# Altium PCB STM32F4_Mixed-Signal_Interface_Board_PCB.PcbDoc
Units mm, origin at the board's own origin, x right, y up, seen from the top; angles counter-clockwise.
Board outline 42 x 34 mm, 4 copper layers (L1 (Signal), L2 (GND), L3 (PWR), L4 (Signal)), stack 1.57 mm thick; 37 components, 27 nets, 178 pads, 67 vias.
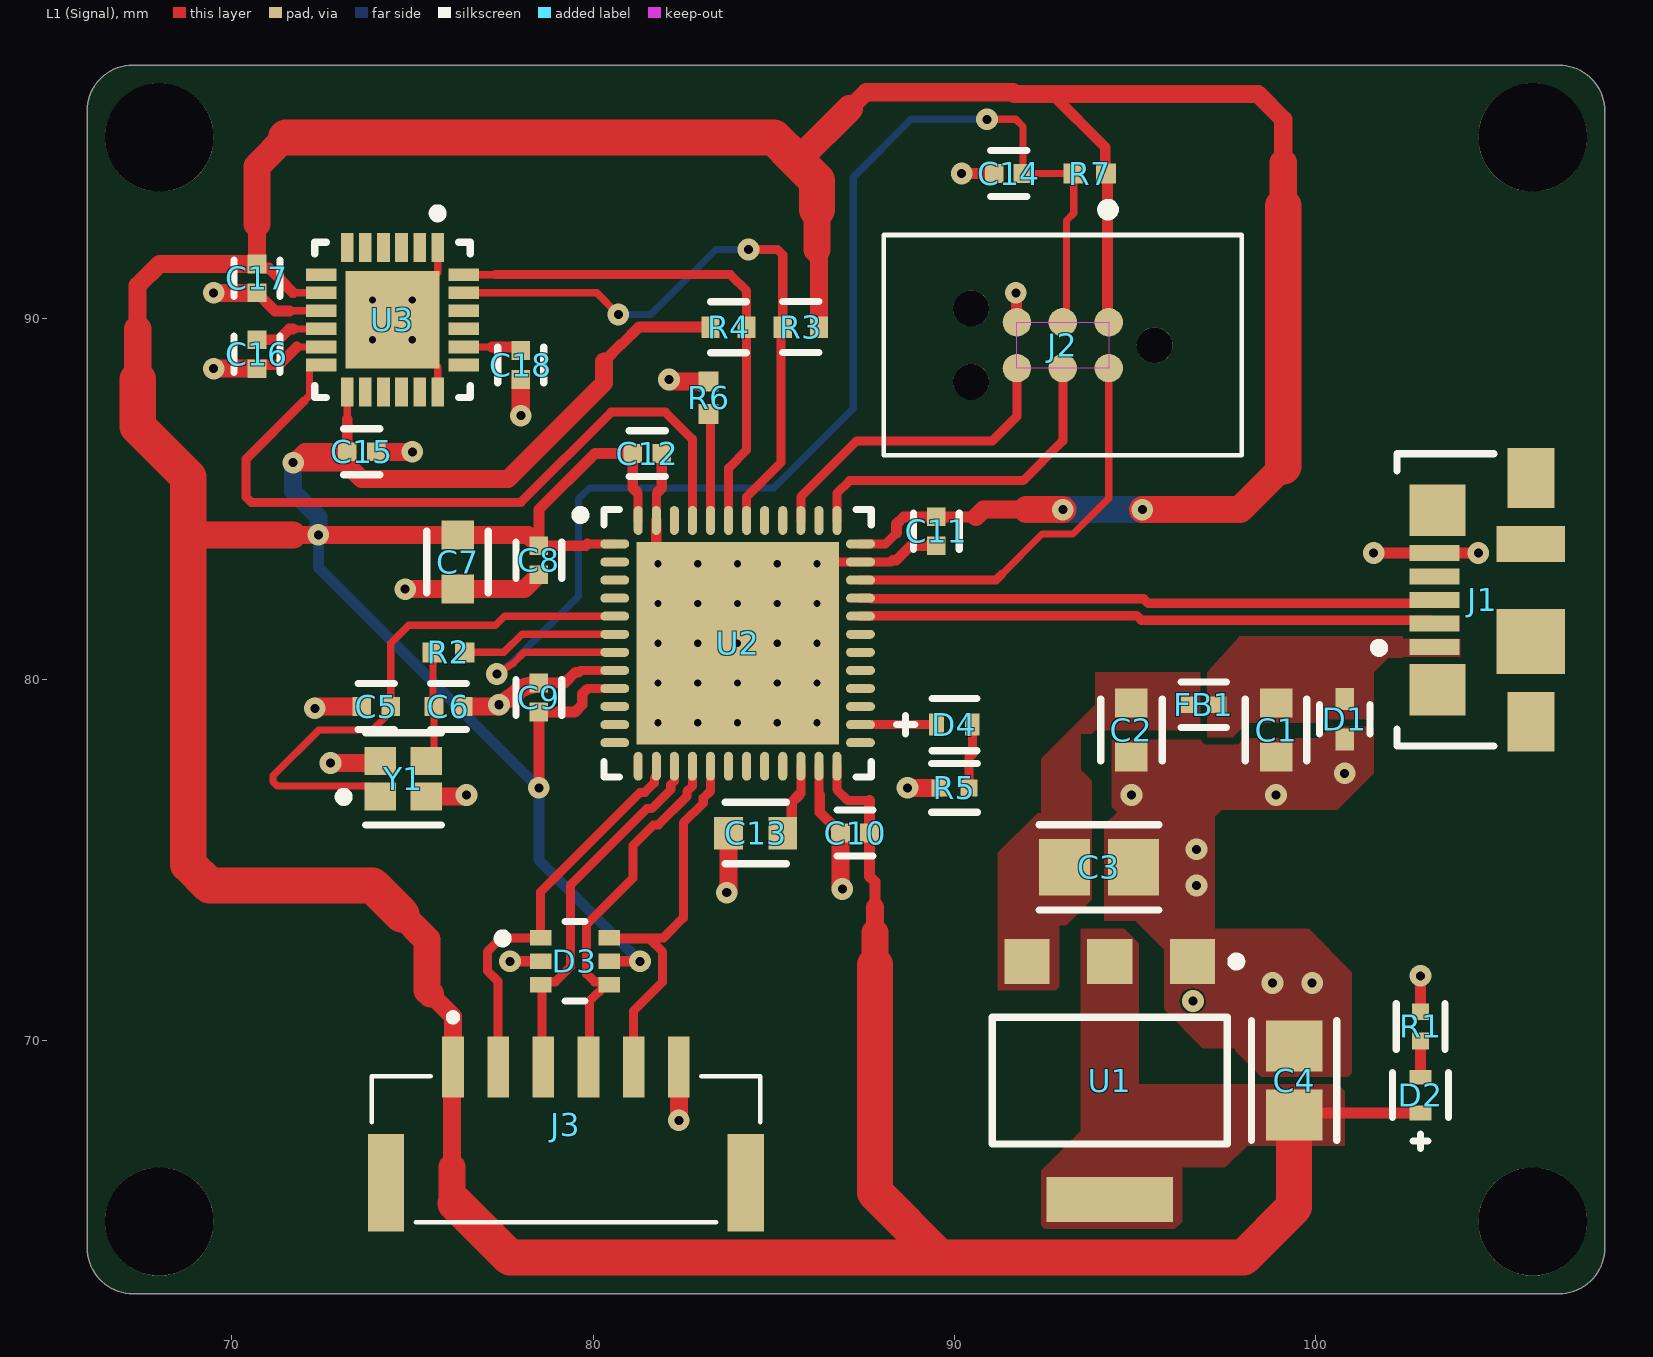
[diagram p0: L1 (Signal) view]
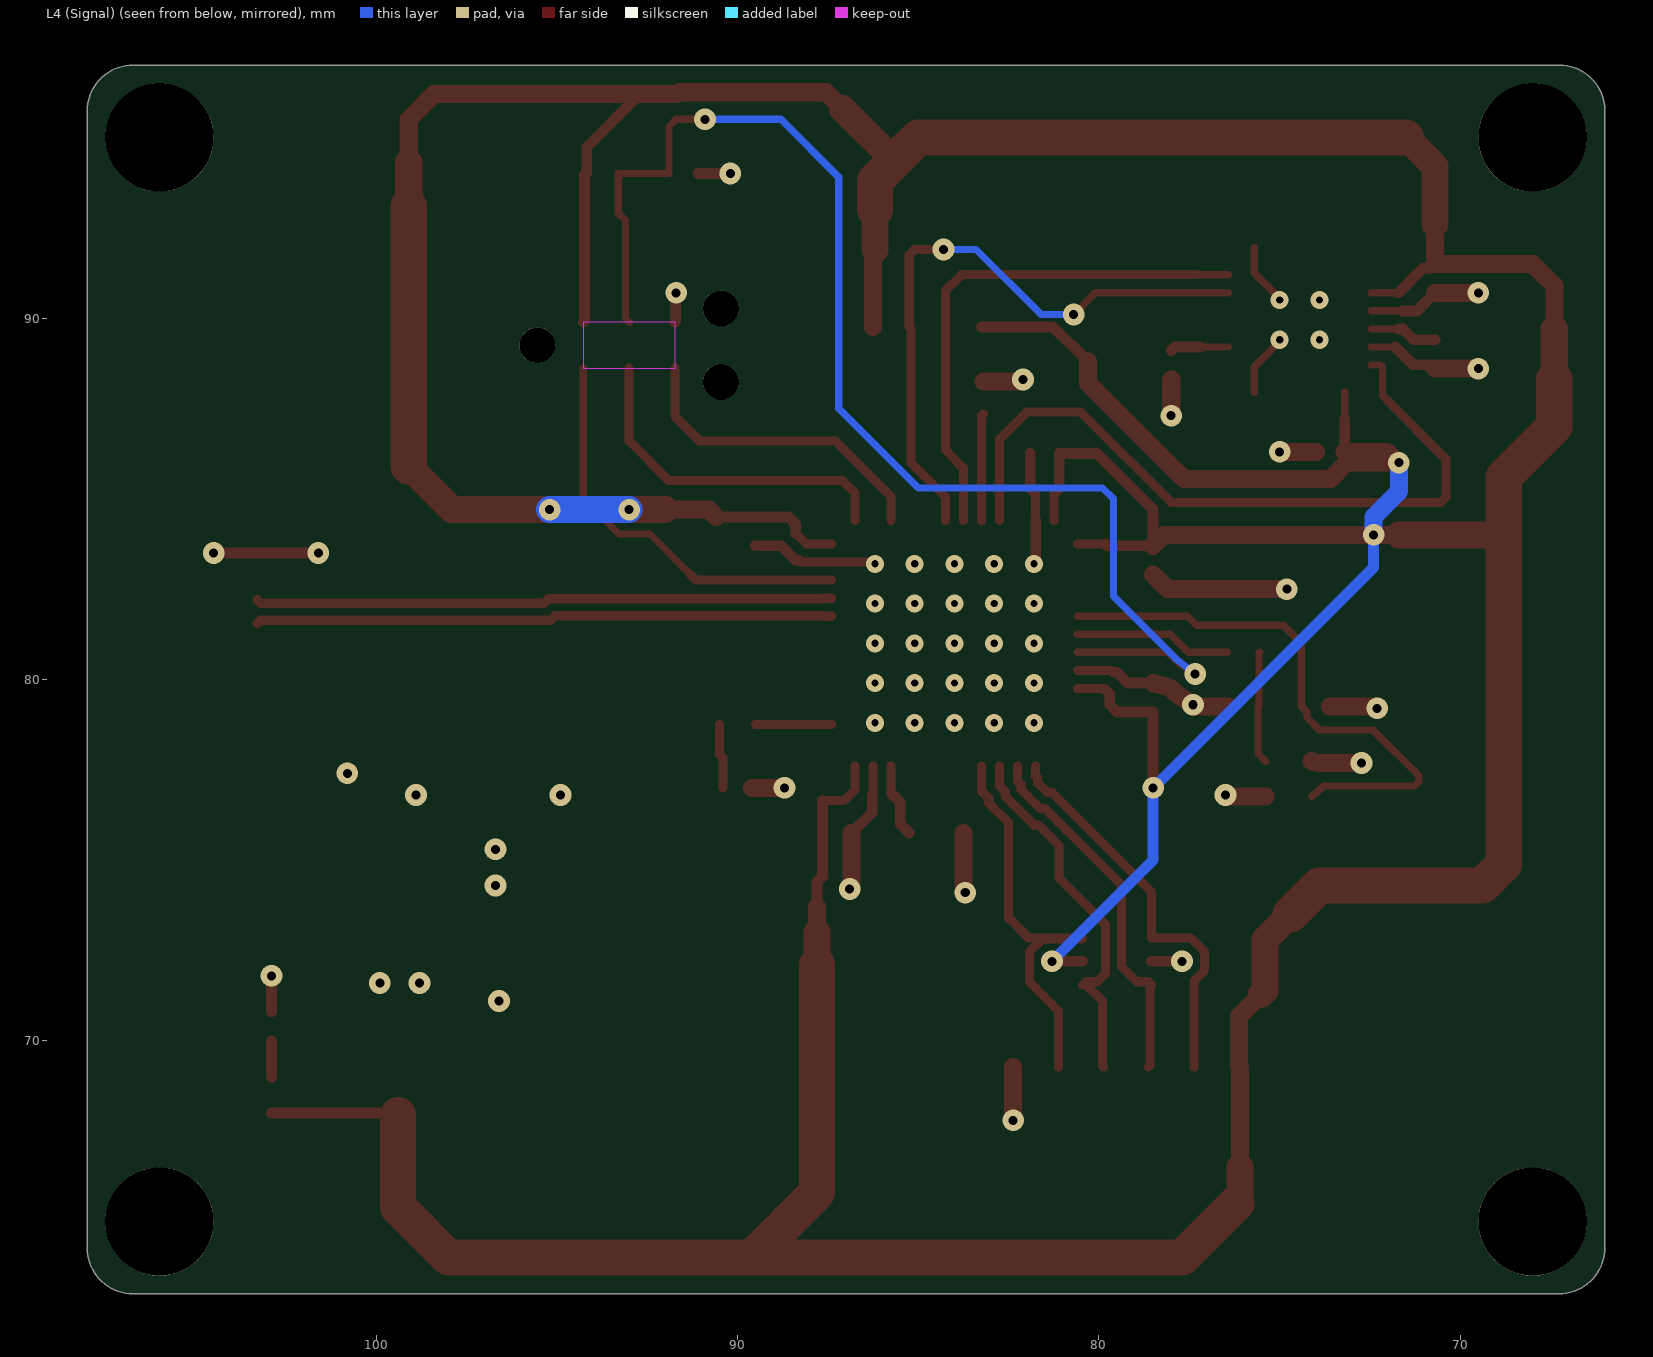
[diagram p1: L4 (Signal) view, seen from below]
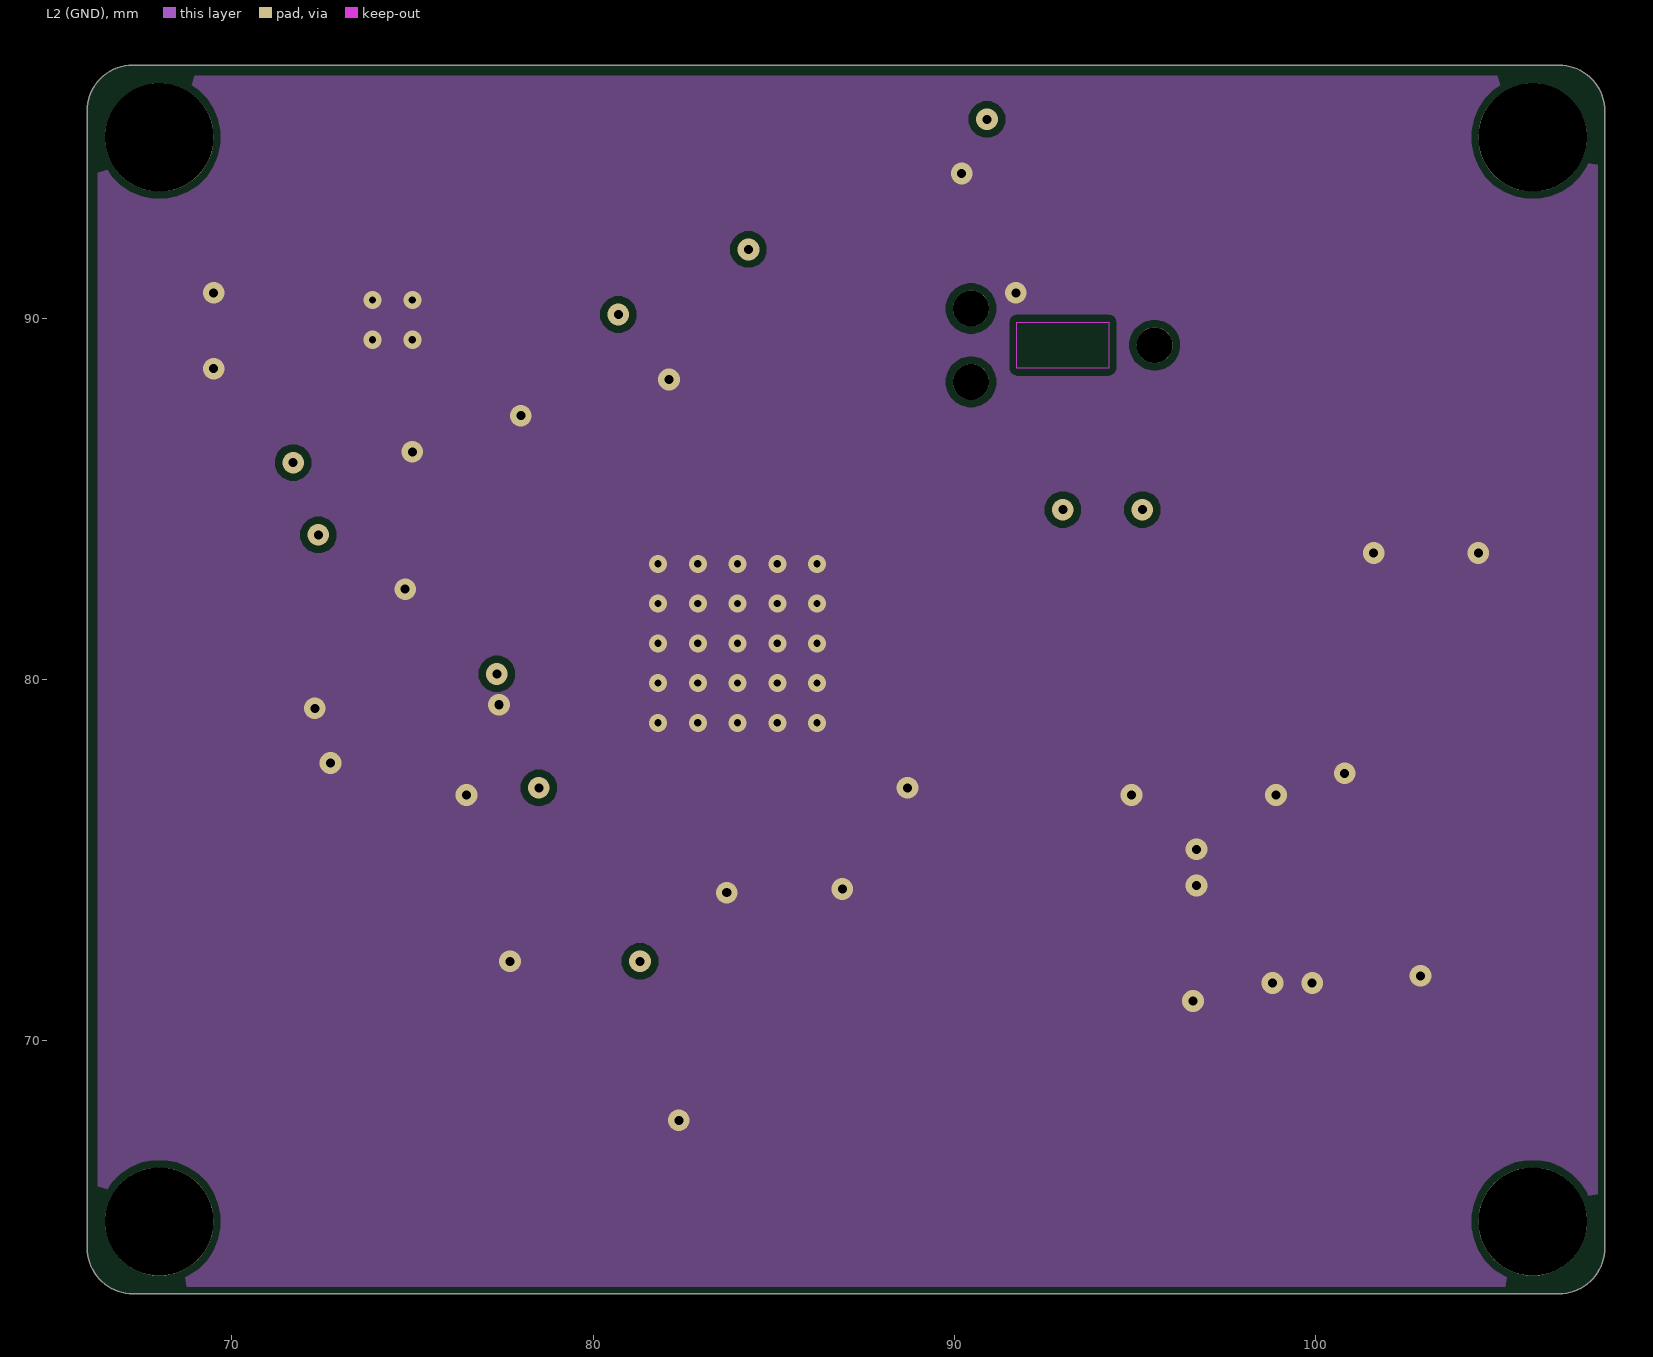
[diagram p2: L2 (GND)]
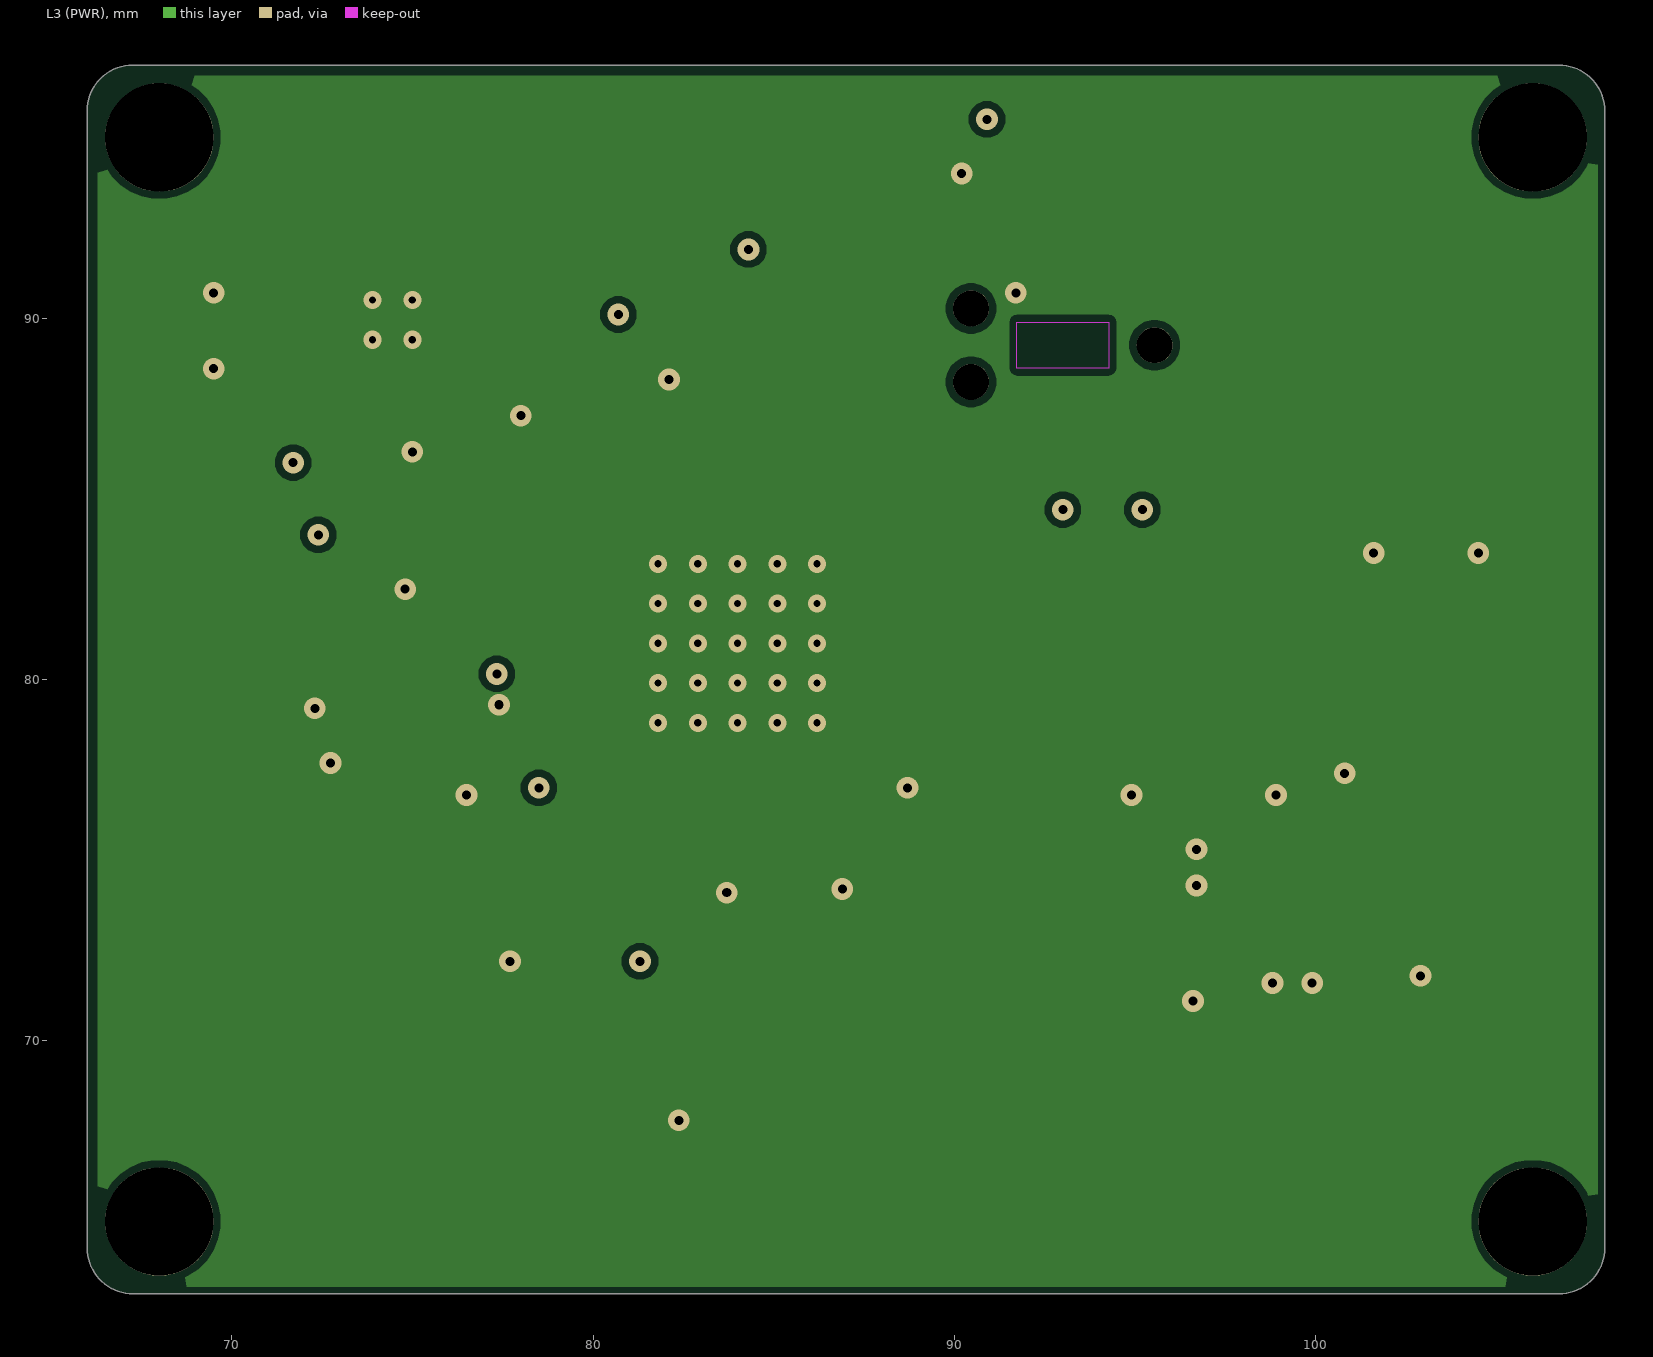
[diagram p3: L3 (PWR)]
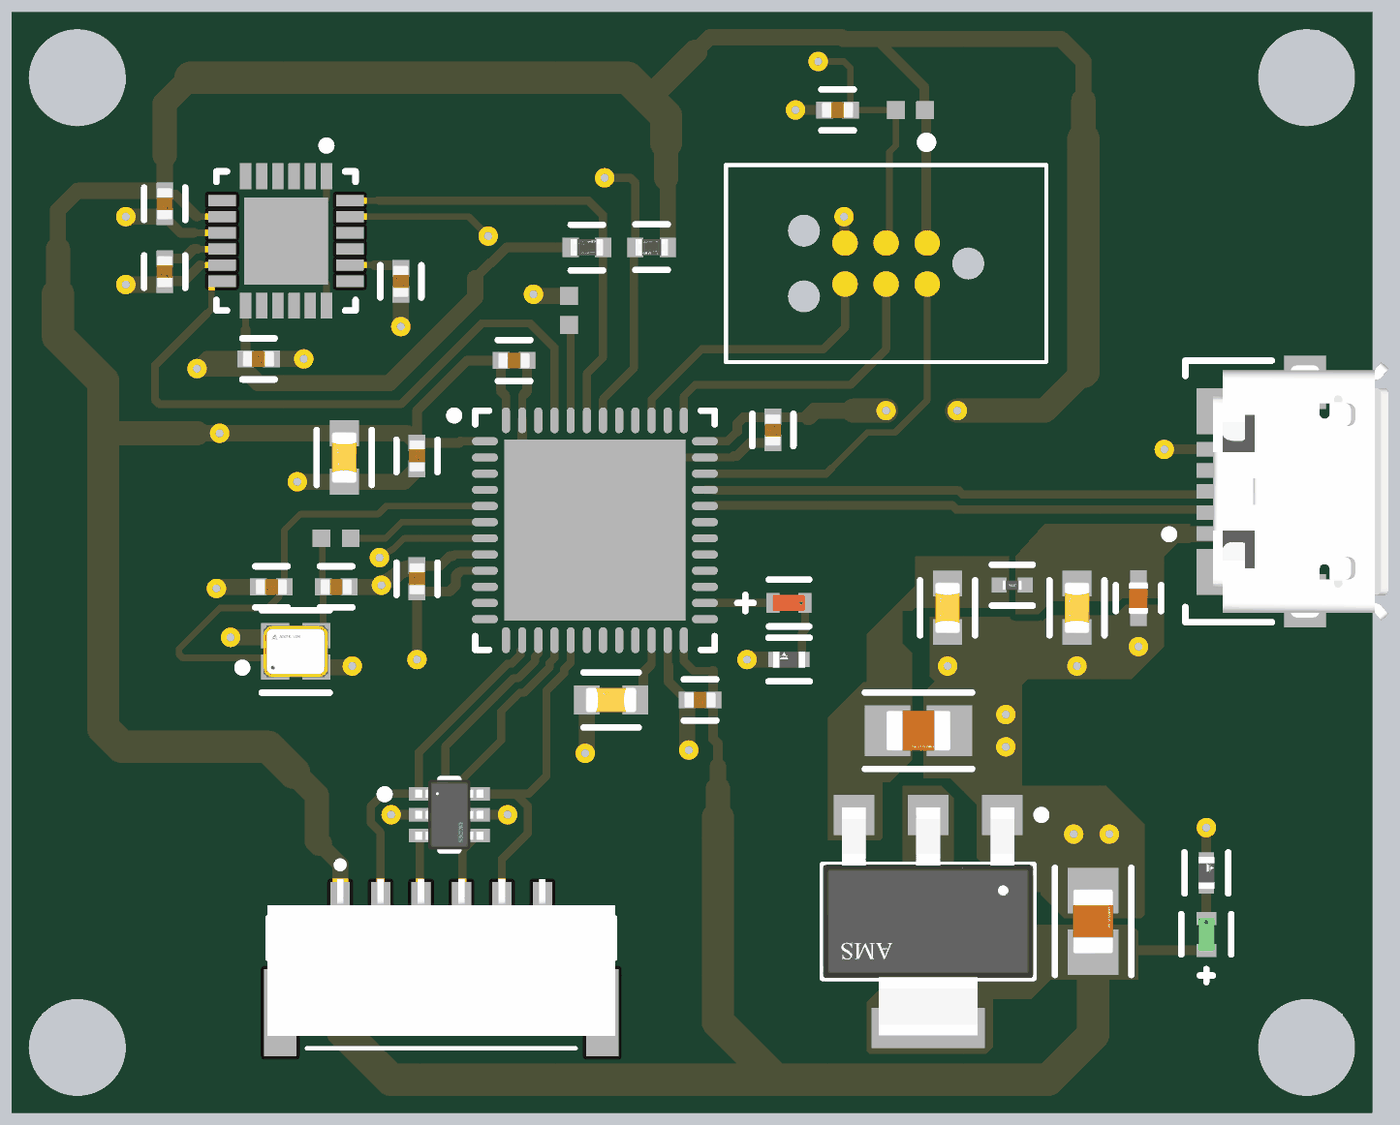
[diagram p4: 3D render of the assembled board from above, using the file's embedded part models]

## Layer stack, top to bottom
Top Solder: solder mask 0.0254, SM-001, Dk 4
L1 (Signal): signal copper 0.035
Dielectric 1: prepreg 0.2, PP-017, Dk 4.6
L2 (GND): signal copper 0.0175
Dielectric 3: core 1.065, Core-039, Dk 4.6
L3 (PWR): signal copper 0.0175
Dielectric 5: prepreg 0.2, PP-017, Dk 4.6
L4 (Signal): signal copper 0.035
Bottom Solder: solder mask 0.0254, SM-001, Dk 4

## Board outline
66,64.27 ccw(c67.27,64.27) 67.27,63 106.73,63 ccw(c106.73,64.27) 108,64.27 108,95.73 ccw(c106.73,95.73) 106.73,97 67.27,97 ccw(c67.27,95.73) 66,95.73

## Design rules (kind name [scope] priority, off if disabled: settings)
Clearance Clearance_MPU6050 [InComponent('U3') vs InComponent('U3')] p1: gap=0.15 ignorepadtopadclearanceinfootprint=FALSE
Clearance [All] p2: gap=0.2 ignorepadtopadclearanceinfootprint=FALSE
DiffPairsRouting [All] p1: maxlimit=0.254 minlimit=0.203 mostfreqgap=0.254 toplayer_maxgap=0.203 toplayer_prefgap=0.203 toplayer_minwidth=0.26 toplayer_maxwidth=0.26 toplayer_prefwidth=0.26 bottomlayer_maxgap=0.203 bottomlayer_prefgap=0.203 bottomlayer_minwidth=0.26 bottomlayer_maxwidth=0.26 bottomlayer_prefwidth=0.26 impedanceprofiledriven=TRUE impedanceprofileid={B25DD0A1-3687-4387-A5FD-A4604B58CD99} impedanceprofilevalue=90.000000 maxuncoupledlength=12.7
HoleSize [All] p1: absolutevalues=TRUE maxlimit=3.5 minlimit=0.025 maxpercent=80.000 minpercent=20.000
PolygonConnect [All] p1: connectstyle=Direct reliefconductorwidth=0.254 reliefentries=4 polygonreliefangle="90 Angle" airgapwidth=0.254
RoutingVias [All] p1: holewidth=0.3 width=0.6 viastyle="Through Hole" minholewidth=0.2 minwidth=0.5 maxholewidth=0.2 maxwidth=0.5
SolderMaskExpansion [All] p1: expansion=0 istentingtop=FALSE
SupplyNets "Schematic Supply Nets_3" [InNet('VBUS')] p1: voltage=0.000
SupplyNets "Schematic Supply Nets_2" [InNet('+3V3')] p2: voltage=0.000
SupplyNets "Schematic Supply Nets_1" [InNet('+5V')] p3: voltage=0.000
SupplyNets "Schematic Supply Nets" [InNet('GND')] p4: voltage=0.000
UnRoutedNet [All] p1: checkbadconnections=TRUE
Width [All] p1: maxlimit=1 minlimit=0.2 preferedwidth=0.3 midlayer1_minwidth=0.254 midlayer1_maxwidth=0.254 midlayer1_prefwidth=0.254 midlayer2_minwidth=0.254 midlayer2_maxwidth=0.254 midlayer2_prefwidth=0.254 minimp=50.000000 maximp=50.000000 favimp=50.000000
27 further rules are at their usual default settings.

## Classes and differential pairs
net class DIFF_USB: USB_D_N USB_D_P
differential pair USB_D: +USB_D_P -USB_D_N

## Components (designator, comment, footprint, x,y, rotation, side; value= is the part's Value field where it differs from the comment)
C1 "2u2" FP-CC0603-DA-MFG 98.9,78.6 r270 top value="2.2 uF"
C2 "2u2" FP-CC0603-DA-MFG 94.9,78.6 r270 top value="2.2 uF"
C3 "22u" FP-0805-L_2_0_0_2-W_1_25-IPC_A 94,74.8 r0 top
C4 "22u" FP-0805-L_2_0_0_2-W_1_25-IPC_A 99.4,68.9 r90 top
C5 "10p" FP-C0402-BB-MFG 74,79.25 r180 top value="10 pF"
C6 "10p" FP-C0402-BB-MFG 76,79.25 r0 top value="10 pF"
C7 "2u2" FP-CC0603-DA-MFG 76.25,83.25 r270 top value="2.2 uF"
C8 "100n" FP-C0402-BB-MFG 78.5,83.3 r270 top value="0.10 μF"
C9 "100n" FP-C0402-BB-MFG 78.5,79.5 r90 top value="0.10 μF"
C10 "100n" FP-C0402-BB-MFG 87.25,75.75 r180 top value="0.10 μF"
C11 "100n" FP-C0402-BB-MFG 89.5,84.1 r270 top value="0.10 μF"
C12 "100n" FP-C0402-BB-MFG 81.5,86.25 r0 top value="0.10 μF"
C13 "2u2" FP-CC0603-DA-MFG 84.5,75.75 r180 top value="2.2 uF"
C14 "100n" FP-C0402-BB-MFG 91.5,94 r180 top value="0.10 μF"
C15 "100n" FP-C0402-BB-MFG 73.6,86.3 r0 top value="0.10 μF"
C16 "100n" FP-C0402-BB-MFG 70.7,89 r270 top value="0.10 μF"
C17 "100n" FP-C0402-BB-MFG 70.7,91.1 r270 top value="0.10 μF"
C18 "2n2" FP-C0402-BB-MFG 78,88.7 r270 top value="0.10 μF"
D1 "5V TVS" FP-GG0402-MFG 100.8,78.9 r270 top value=10pF
D2 "Green LED" FP-SM0402GC-MFG 102.9,68.5 r90 top
D3 "D1213A-04S-7" FP-SOT363-MFG 79.5,72.2 r0 top
D4 "Red LED" FP-SM0402RC-MFG 90,78.75 r0 top
FB1 "120R" FP-MMZ0603-IPC_A 96.9,79.3 r180 top
J1 "473460001" FP-473460001-MFG 105.6,82.2 r90 top
J2 "TC2030-IDC-NL" TAG_TC2030-IDC-NL 93,89.25 r180 top
J3 "SM06B-GHS-TB" JST_SM06B-GHS-TB 79.25,67.4 r0 top
R1 "1k" FP-MCS0402-IPC_C 102.9,70.4 r90 top
R2 "0R" RESC1005X40X20NL05T10 76,80.75 r180 top
R3 "2k2" FP-RT0402-MFG 85.75,89.75 r180 top value=2.2KΩ
R4 "2k2" FP-RT0402-MFG 83.75,89.75 r0 top value=2.2KΩ
R5 "1k" FP-MCS0402-IPC_C 90,77 r180 top
R6 "10k" RESC1005X40X20NL05T10 83.2,87.8 r270 top
R7 "10k" RESC1005X40X20NL05T10 93.75,94 r0 top
U1 "AMS1117-3.3" FP-AMS1117-IPC_C 94.3,68.9 r270 top
U2 "STM32F411CEU6" STM-UFQFPN48_L 84,81 r0 top
U3 "MPU-6050" IS-QFN-24_V 74.45,89.95 r270 top
Y1 "24MHz" FP-ABM11W-MFG 74.75,77.25 r0 top

## Footprints (in the part's own frame and the unit in brackets; to place one, negate y for a bottom-side part, rotate by r counter-clockwise, add the part's x,y. Pads: shape width x height; smd on the part's side, far side on the other; paste and mask are expansions set on the pad)
FP-0805-L_2_0_0_2-W_1_25-IPC_A [mil]
  rect 55.42x61.5 smd paste+0 mask+0: 1(-37.49,0) 2(37.49,0)
  silkscreen extent -65,-46 65,46, body extent -85,-50 85,50, height 10
FP-473460001-MFG [mm]
  rect 0.45x1.38 smd paste+0 mask+0: 1(-1.3,2.31) 2(-0.65,2.31) 3(0,2.31) 4(0.65,2.31) 5(1.3,2.31)
  rect 1.425x1.55 smd paste+0 mask+0: 6(-2.488,2.225) 7(2.488,2.225)
  rect 1.65x1.3 smd paste+0 mask+0: 8(-3.375,-0.35) 11(3.375,-0.35)
  rect 1.8x1.9 smd paste+0 mask+0: 9(-1.15,-0.35)
  rect 1x1.9 smd paste+0 mask+0: 10(1.55,-0.35)
  silkscreen extent -4.05,0.67 4.05,3.97, body extent -4.3,-2.48 4.3,3.45, height 0.25
FP-ABM11W-MFG [mm]
  rect 0.875x0.775 smd paste+0 mask+0: 1(-0.637,-0.487) 2(0.637,-0.487) 3(0.637,0.487) 4(-0.637,0.487)
  silkscreen extent -1.77,-1.28 1.05,1.28, body extent -1.17,-0.97 1.17,0.97, height 0.25
FP-AMS1117-IPC_C [mm]
  rect 1.25x1.25 smd paste+0 mask+0: 1(-3.295,2.29) 2(-3.295,0) 3(-3.295,-2.29)
  rect 1.25x3.5 smd paste+0 mask+0: 4(3.295,0)
  silkscreen extent -3.42,-3.25 1.75,3.63, body extent -3.9,-3.35 3.9,3.35, height 0.25
FP-C0402-BB-MFG [mm]
  rect 0.52x0.52 smd paste+0 mask+0: 1(-0.4,0) 2(0.4,0)
  silkscreen extent -0.5,-0.64 0.5,0.64, body extent -0.8,-0.4 0.8,0.4, height 0.25
FP-CC0603-DA-MFG [mm]
  rect 0.8x0.9 smd paste+0 mask+0: 1(-0.75,0) 2(0.75,0)
  silkscreen extent -0.85,-0.85 0.85,0.85, body extent -1.35,-0.75 1.35,0.75, height 0.25
FP-GG0402-MFG [mm]
  rect 0.61x0.51 smd paste+0 mask+0: 1(-0.56,0) 2(0.56,0)
  silkscreen extent -0.4,-0.7 0.4,0.7, body extent -0.96,-0.43 0.96,0.43, height 0.25
FP-MCS0402-IPC_C [mm]
  rect 0.465x0.472 smd paste+0 mask+0: 1(-0.404,0) 2(0.404,0)
  silkscreen extent -0.64,-0.67 0.64,0.67, body extent -0.74,-0.38 0.74,0.38, height 0.25
FP-MMZ0603-IPC_A [mm]
  rect 0.463x0.463 smd paste+0 mask+0: 1(-0.4,0) 2(0.4,0)
  silkscreen extent -0.63,-0.63 0.63,0.63, body extent -0.83,-0.43 0.83,0.43, height 0.25
FP-RT0402-MFG [mm]
  rect 0.5x0.6 smd paste+0 mask+0: 1(-0.5,0) 2(0.5,0)
  silkscreen extent -0.5,-0.71 0.5,0.7, body extent -0.85,-0.4 0.85,0.4, height 0.25
FP-SM0402GC-MFG [mil]
  rect 16x24 smd paste+0 mask+0: 1(-19.5,0) 2(19.5,0)
  silkscreen extent -58,-30 25,31, body extent -31,-18 31,18, height 10
FP-SM0402RC-MFG [mil]
  rect 16x24 smd paste+0 mask+0: 1(-19.5,0) 2(19.5,0)
  silkscreen extent -63,-29 24,29, body extent -31,-18 31,18, height 10
FP-SOT363-MFG [mm]
  rect 0.6x0.42 smd paste+0 mask+0: 1(-0.95,0.65) 2(-0.95,0) 3(-0.95,-0.65) 4(0.95,-0.65) 5(0.95,0) 6(0.95,0.65)
  silkscreen extent -2.12,-1.1 0.28,1.1, body extent -1.35,-1.2 1.35,1.2, height 0.25
IS-QFN-24_V [mm] "QFN, 24-Leads, Body 4x4mm, Pitch 0.5mm, Thermal Pad 2.7x2.6mm"
  rect 0.8x0.35 smd: 1(-2,1.25) 2(-2,0.75) 3(-2,0.25) 4(-2,-0.25) 5(-2,-0.75) 6(-2,-1.25) 13(2,-1.25) 14(2,-0.75) 15(2,-0.25) 16(2,0.25) 17(2,0.75) 18(2,1.25)
  rect 0.35x0.85 smd mask+0.102: 7(-1.25,-1.975) 8(-0.75,-1.975) 9(-0.25,-1.975) 10(0.25,-1.975) 11(0.75,-1.975) 12(1.25,-1.975) 19(1.25,1.975) 20(0.75,1.975) 21(0.25,1.975) 22(-0.25,1.975) 23(-0.75,1.975) 24(-1.25,1.975)
  rect 2.7x2.6 smd: 25(0,0)
  silkscreen extent -3.07,-2.15 2.15,2.15, body extent -2,-2 2,2, height 0.95
JST_SM06B-GHS-TB [mm]
  rect 0.6x1.7 smd paste+0 mask+0.102: 1(-3.125,1.875) 2(-1.875,1.875) 3(-0.625,1.875) 4(0.625,1.875) 5(1.875,1.875) 6(3.125,1.875)
  rect 1x2.7 smd paste+0 mask+0.102: MP1(-4.975,-1.325) MP2(4.975,-1.325)
  silkscreen extent -5.38,-2.42 5.38,3.35, body extent -5.38,-2.05 5.38,2.8, height 4.25
RESC1005X40X20NL05T10 [mm] "Chip Resistor, 2-Leads, Body 1.00x0.50mm, IPC Medium Density"
  rect 0.55x0.55 smd: 1(-0.45,0) 2(0.45,0)
  body extent -0.53,-0.27 0.53,0.28, height 0.4
STM-UFQFPN48_L [mm] "QFN, 48-Leads, Body 7.1x7.1mm, Pitch 0.5mm, Thermal Pad 5.6x5.6mm, IPC High Density"
  oval 0.8x0.25 smd: 1(-3.4,2.75) 2(-3.4,2.25) 3(-3.4,1.75) 4(-3.4,1.25) 5(-3.4,0.75) 6(-3.4,0.25) 7(-3.4,-0.25) 8(-3.4,-0.75) 9(-3.4,-1.25) 10(-3.4,-1.75) 11(-3.4,-2.25) 12(-3.4,-2.75) 25(3.4,-2.75) 26(3.4,-2.25) 27(3.4,-1.75) 28(3.4,-1.25) 29(3.4,-0.75) 30(3.4,-0.25) 31(3.4,0.25) 32(3.4,0.75) 33(3.4,1.25) 34(3.4,1.75) 35(3.4,2.25) 36(3.4,2.75)
  oval 0.25x0.8 smd: 13(-2.75,-3.4) 14(-2.25,-3.4) 15(-1.75,-3.4) 16(-1.25,-3.4) 17(-0.75,-3.4) 18(-0.25,-3.4) 19(0.25,-3.4) 20(0.75,-3.4) 21(1.25,-3.4) 22(1.75,-3.4) 23(2.25,-3.4) 24(2.75,-3.4) 37(2.75,3.4) 38(2.25,3.4) 39(1.75,3.4) 40(1.25,3.4) 41(0.75,3.4) 42(0.25,3.4) 43(-0.25,3.4) 44(-0.75,3.4) 45(-1.25,3.4) 46(-1.75,3.4) 47(-2.25,3.4) 48(-2.75,3.4)
  rect 5.6x5.6 smd: 49(0,0)
  silkscreen extent -4.47,-3.7 3.7,3.7, body extent -3.55,-3.55 3.55,3.55, height 0.6
TAG_TC2030-IDC-NL [mil]
  round 30.98 smd paste-39.37: 1(-50,-25) 2(-50,25) 3(0,-25) 4(0,25) 5(50,-25) 6(50,25)
  round 39.02 hole 39.02 unplated: ""(-100,0) ""(100,-40) ""(100,40)
  Keep-Out Layer region: 50,-25.03 -50.06,-25.03 -50.06,25 50,25
  silkscreen extent -195,-154 195,120

## Part data
C1 C2 C7 C13: library part CMP-03422-000257-1, "CAP CER 2.2UF 16V X5R 0603", Capacitance="2.2 uF", Manufacturer=YAGEO, Manufacturer Part Number=CC0603MRX5R7BB225, Package=CC0603-DA, Temperature="-55°C to +125°C", Temperature Characteristic=X5R, Temperature Coefficient=15%, Temperature Range High=+125°C, Temperature Range Low=-55°C, Tolerance=0.2, Voltage="16 V", Automotive=No, Category=Cap, ComponentLink2Description=Datasheet, ComponentLink2URL=http://www.yageo.com/documents/recent/UPY-GPHC_X7R_6.3V-to-50V_18.pdf, Device Class L1="Passive Components", Device Class L2=Capacitors, Device Class L3="Ceramic Capacitors", Digikey Description="CAP CER 2.2UF 16V X5R 0603", Footprint Url=http://www.yageo.com/exep/pages/download/literatures/UPY-C_GEN_24.pdf, Height=0.9mm, Lead Free=Yes, Material=Ceramic, Mouser Description="Multilayer Ceramic Capacitors MLCC - SMD/SMT 2.2uF 16V 20% Ceramic Capacitor", Octopart=https://octopart.com/cc0603mrx5r7bb225-yageo-81932636, RoHS=TRUE, Voltage Rating="16 V"
C3 C4: library part CMP-14477-000140-3, "Multilayer Ceramic Capacitor 22uF 16V X5R 20% SMD 0805 T/R", Capacitance=22uF, Case Code (Imperial)=0805, Case Code (Metric)=2012, Dielectric=X5R, Max Operating Temperature=85°C, Min Operating Temperature=-55°C, Package Quantity=1, Resistor Type=Ceramic, Tolerance=20%, Voltage Rating=16V, Case/Package=0805, Construction=Flat, Halogen Free="Halogen Free", Height=1.25mm, Length=2mm, Mount="Surface Mount", Packaging="Tape and Reel", RoHS Compliant=Yes, Series=M, Termination=SMD/SMT, Thickness=0.049inch, Voltage Rating (DC)=16V, Width=0.039inch
C5 C6: library part CMP-03020-017648-1, "C0402 10 pF X8R 1.00% 16 V", Capacitance="10 pF", Manufacturer=Kemet, Manufacturer Part Number=C0402C100F4HACAUTO, Package=C0402-BB, Temperature="-55°C to +125°C", Temperature Characteristic=X8R, Temperature Coefficient=15%, Temperature Range High=+125°C, Temperature Range Low=-55°C, Tolerance=0.01, Voltage Rating="16 V", Automotive=No, Category=Cap, ComponentLink2Description=Datasheet, ComponentLink2URL=https://content.kemet.com/datasheets/KEM_C1002_X7R_SMD.pdf, Device Class L1="Passive Components", Device Class L2=Capacitors, Device Class L3="Ceramic Capacitors", Height=0.55mm, Ipc Land Pattern Name=CAPC10050X50, Lead Free=Yes, Material=Ceramic, Octopart=https://octopart.com/c0402c100f4hacauto-kemet-88079165, RoHS=TRUE
C8 C9 C10 C11 C12 C14 C15 C16 C17 C18: library part CMP-2008-03082-2, "CAP CER 0.1UF 16V X7R 0402", Capacitance="0.10 μF", Manufacturer=Kemet, Manufacturer Part Number=C0402C104K4RACAUTO, Package=C0402-BB, Temperature="-55°C to +125°C", Temperature Characteristic=X7R, Temperature Coefficient=15%, Temperature Range High=+125°C, Temperature Range Low=-55°C, Tolerance=0.1, Voltage Rating="16 V", Automotive=No, Category=Cap, ComponentLink2Description=Datasheet, ComponentLink2URL=https://content.kemet.com/datasheets/KEM_C1002_X7R_SMD.pdf, Device Class L1="Passive Components", Device Class L2=Capacitors, Device Class L3="Ceramic Capacitors", Digikey Description="CAP CER 0.1UF 16V X7R 0402", Height=0.55mm, Ipc Land Pattern Name=CAPC10050X50, Lead Free=Yes, Material=Ceramic, Mouser Description="Cap Ceramic 0.1uF 16V X7R 10% Pad SMD 0402 125C Automotive T/R", Octopart=https://octopart.com/c0402c104k4racauto-kemet-17309149, RoHS=TRUE
D1: library part CMP-04587-000001-1, "TVS DIODE 5V 12V 0402", Breakdown Voltage=5.5V, Capacitance=10pF, Clamping Voltage=12V, Manufacturer="AVX Corporation", Manufacturer Part Number=GG040205100N2P, Package=GG0402, Peak Pulse Current=16A, Peak Pulse Power=96W, Reverse Standoff Voltage=5V, Temperature="-55°C to +125°C", Temperature Range High=+125°C, Temperature Range Low=-55°C, Automotive=No, Category=Diode, ComponentLink2Description=Datasheet, ComponentLink2URL=http://datasheets.avx.com/AVX-GiGuard.pdf, Device Class L1="Circuit Protection", Device Class L2="TVS Diodes", Device Class L3=unset, Digikey Description="TVS DIODE 5V 12V 0402", Direction=Bidirectional, Height=0.55mm, Ipc Land Pattern Name=DIOC10060X50, Lead Free=Yes, Number Of Channels=1, Octopart=https://octopart.com/gg040205100n2p-avx-81066081, RoHS=TRUE
D2: library part CMP-35283-000001-2, "LED GREEN CLEAR 0402 SMD", Case Code (Imperial)=0402, Case Code (Metric)=1005, Color=Green, Forward Voltage=1.9V, Lens Color=Colorless, Test Current=20mA, Case/Package=0402, Dominant Wavelength=572nm, Height=0.71mm, Length=1mm, Lens Size=1mm, Lens Style=Flat, Lens Transparency=Clear, Luminous Intensity=28.5mcd, Mount="Surface Mount", Packaging="Tape and Reel", Viewing Angle=130°, Width=0.5mm
D3: library part CMP-12828-000023-1, "TVS DIODE 3.3V 10V SOT363", Breakdown Voltage=6V, Capacitance=1.2pF, Case/Package=SOT-363, Clamping Voltage=10V, Leakage Current=1uA, Max Operating Temperature=150°C, Max Power Dissipation=200mW, Max Surge Current=5A, Min Operating Temperature=-55°C, Package Quantity=3000, Peak Pulse Current=1A, Power Line Protection=Yes, Reverse Standoff Voltage=3.3V, Test Current=1mA, Contact Plating=Tin, Depth=1.3mm, Direction=Unidirectional, ESD Protection=Yes, Height=1mm, Lead Free="Lead Free", Length=2.15mm, Max Reverse Leakage Current=1uA, Min Breakdown Voltage=6V, Mount="Surface Mount", Number of Bidirectional Channels=4, Number Of Channels=4, Number of Pins=6, Packaging="Tape and Reel", Polarity=Unidirectional, Radiation Hardening=No, REACH SVHC="No SVHC", Termination=SMD/SMT, Width=1.35mm, Working Voltage=3.3V
D4: library part CMP-35283-000003-1, "LED RED CLEAR 0402 SMD", Case Code (Imperial)=0402, Case Code (Metric)=1005, Color=Red, Forward Voltage=2.1V, Lens Color=Colorless, Test Current=20mA, Case/Package=0402, Dominant Wavelength=631nm, Height=0.71mm, Length=1mm, Lens Size=1mm, Lens Style=Flat, Lens Transparency=Clear, Luminous Intensity=90mcd, Mount="Surface Mount", Packaging="Tape and Reel", Viewing Angle=130°, Width=0.5mm
FB1: library part CMP-08257-000058-1, "Signal Line Ferrite Bead 120Ω @ 100MHz 480mA DCR 220mΩ SMD 0201", Case Code (Imperial)=0201, Case Code (Metric)=0603, DC Resistance (DCR)=220mR, Max Current Rating=480mA, Max Operating Temperature=125°C, Min Operating Temperature=-55°C, Package Quantity=15000, Tolerance=25%, Case/Package=0201, Height=0.013inch, Impedance=120R, Length=0.024inch, Max DC Current=480mA, Mount="Surface Mount", Number of Lines=1, Packaging="Tape and Reel", RoHS Compliant=Yes, Termination=SMD/SMT, Weight=6E-06oz, Width=0.012inch
J1: library part CMP-2000-05246-2, "CONN RCPT USB2.0 MICRO B SMD R/A", Current Rating=1.8A, Manufacturer=Molex, Package=0, Temperature="-30°C to +85°C", Temperature Range High=+85°C, Temperature Range Low=-30°C, Voltage Rating=30V, Automotive=No, Category=Conn, ComponentLink2Description=Datasheet, ComponentLink2URL=https://www.molex.com/webdocs/datasheets/pdf/en-us/0473460001_IO_CONNECTORS.pdf, Conn Orientation="Right Angle", Contact Material=Gold,Nickel, Device Class L1=Connectors, Device Class L2="USB Connectors", Device Class L3=unset, Digikey Description="CONN RCPT USB2.0 MICRO B SMD R/A", Footprint Url=https://www.molex.com/pdm_docs/sd/473460001_sd.pdf, Height=2.945mm, Is Female=yes, Lead Free=Yes, Manufacturer Part Number=473460001, Number Of Contacts=5, Octopart=https://octopart.com/47346-0001-molex-7164928, Pitch=0.65mm, RoHS=TRUE, Shielding=true, Usb Standard="USB 2.0"
J2: library part CMP-003-000000-1, "CABLE ADAPTER 6 POS", Package=None, Availability=Unavailable, Component Type=Standard, Design Item ID=TC2030-IDC-NL, MP=TC2030-IDC-NL, Pin Count=6, Price=None, Source=TC2030-IDC-NL.SchLib
J3: library part CMP-002-00071-1, "Connector Header Surface Mount, Right Angle 6 position 0.049 (1.25mm)", Case/Package=None, Check_prices=https://www.snapeda.com/parts/SM06B-GHS-TB/JST/view-part/?ref=eda, Component Type=Standard, Design Item ID=SM06B-GHS-TB, MF="JST Sales", MP=SM06B-GHS-TB, Pins=6, SnapEDA_Link=https://www.snapeda.com/parts/SM06B-GHS-TB/JST/view-part/?ref=snap, Source=SM06B-GHS-TB.SchLib
R1 R5: library part CMP-2002-02445-2, "RES SMD 1.2K OHM 1% 1/10W 0402", Case/Package=0402, Max Operating Temperature=125°C, Max Power Dissipation=63mW, Min Operating Temperature=-55°C, Package Quantity=10000, Resistance=1kR, Temperature Coefficient=25ppm/°C, Tolerance=0.1%, Composition="Thin Film", Contact Plating=Tin, Depth=0.5mm, Height=0.015inch, Lead Free="Lead Free", Length=0.039inch, Military Standard=Not, Number of Terminations=2, Packaging="Tape and Reel", Width=0.02inch
R2 R6 R7: library part CMP-2002-01682-1, Manufacturer="Vishay BCcomponents", Part Number=TNPW040210K0DEED
R3 R4: library part CMP-03412-027179-1, "RES SMD 2.2K OHM 0.1% 1/16W 0402", Manufacturer=Yageo, Manufacturer Part Number=RT0402BRB072K2L, Package=RT0402, Power Rating=0.063W, Resistance=2.2KΩ, Temperature="-55°C to +155°C", Temperature Coefficient="10 ppm/°C", Temperature Range High=+155°C, Temperature Range Low=-55°C, Tolerance=0.001, Voltage Rating=50V, Automotive=No, Category=Res, ComponentLink2Description=Datasheet, ComponentLink2URL=http://www.yageo.com/documents/recent/PYu-RT_1-to-0.01_RoHS_L_9.pdf, Composition="Thin Film", Device Class L1="Passive Components", Device Class L2=Resistors, Device Class L3="Chip SMD Resistors", Digikey Description="RES SMD 2.2K OHM 0.1% 1/16W 0402", Footprint Url=http://www.yageo.com/exep/pages/download/literatures/PYu-R_Mount_10.pdf, Height=0.35mm, Ipc Land Pattern Name=RESC10050X30, Lead Free=Yes, Octopart=https://octopart.com/rt0402brb072k2l-yageo-71392561, RoHS=TRUE, Series=RT
U1: library part CMP-209535-000001-1, "LDO Voltage Regulators 1A, 3.3V", Dropout Voltage=1.1V, Manufacturer="Advanced Monolithic Systems", Max Junction Temp=+125°C, Max Power Dissipation=1.2W, Max Supply Voltage=15V, Nominal Supply Current=5mA, Output Current=1A, Output Voltage=3.3V, Package=AMS1117, Temperature="-40°C to +125°C", Temperature Range Low=-40°C, Automotive=No, Category=IC, ComponentLink2Description=Datasheet, ComponentLink2URL=http://www.advanced-monolithic.com/pdf/ds1117.pdf, Device Class L1="Integrated Circuits (ICs)", Device Class L2="Power Management ICs", Device Class L3="Voltage Regulators - Linear", Height=1.8mm, Ipc Land Pattern Name=SOT229P700X180-4, Lead Free=Yes, Manufacturer Part Number=AMS1117-3.3, Number Of Outputs=1, Octopart=https://octopart.com/ams1117-3.3-advanced+monolithic+systems-25899300, Output Type=Fixed, RoHS=TRUE, Standoff Height=0.64mm, Temperature Range High=+125°C
U2: library part CMP-0243-00165-1, "ARM Cortex-M4 32-bit MCU+FPU, 512 KB Flash, 128 KB RAM, 36 I/Os, 48-Pin UFQFPN, -40 to 85 degC, Tray", I/Os (High Current)=36, Operating Frequency(F) (Processor speed) (MHz)=100, Package Description=UFQFPN48, Package Reference="48-Pin Ultra Thin Fine Pitch Quad Flat No-Lead, 7 x 7 x 0.6 mm Body, 0.5 mm Pitch, Exposed Pad", Supply Voltage(Vcc) min (V)=1.7, ComponentLink1Description="Manufacturer URL", ComponentLink1URL=http://www.st.com/, ComponentLink2Description=Datasheet, ComponentLink2URL=http://www.st.com/st-web-ui/static/active/en/resource/technical/document/datasheet/DM00115249.pdf, Core="ARM Cortex-M4", DatasheetVersion="Rev. 6", FLASH Size (Prog) (kB)=512, Internal RAM Size (kB)=128, Mounting Technology="Surface Mount", Packing=Tray
U3: library part CMP-1753-00002-2, "3-Axis Gyroscope, Accelerometer and a Digital Motion Processor(TM) (DMP), 2.375 to 3.46 V, -40 to 85 degC, 24-Pin QFN, RoHS, Tape and Reel", Manufacturer=InvenSense, Standard Package=5,000, Category=Sensors,Transducers, Datasheet URL=http://datasheet.octopart.com/MPU-6050-InvenSense-datasheet-14421344.pdf, Datasheet Version="Rev. 3.3, 05/2012", Dynamic Catalog=MPU-6000™Series, Family=Multifunction, Featured Product=MPU-60506-Axis,IntegratedI²CSolution, Manufacturer URL=http://www.invensense.com/, Online Catalog=MPU-6000™Series, Other Names="1428-1007-2 / MPU6050", Output Type=Digital, Sensor Type=MotionTracking, Unit PriceUSD=Digital
Y1: library part CMP-27762-009014-1, "Crystal 24MHz ±10ppm 7pF SMD-4 2mm x 1.6mm", RoHS Compliant=Yes

## Free pads (board coordinates)
  round 3 hole 3 unplated: 1(68,65) 2(68,95) 3(106,95) 4(106,65)

## Via types
v1: diameter 0.6, hole 0.25, L1 (Signal) to L4 (Signal), 38 vias
v2: diameter 0.5, hole 0.2, L1 (Signal) to L4 (Signal), 29 vias

## Nets (pads, with @x,y where several pads share a name; then routed paths per layer and width w, separated by ;. In a path a pad name is that pad's centre, name@x,y a point inside that pad or via, vN(x,y) a via of type N, cw(c..) or ccw(c..) an arc to the next point about the centre after c; other vN are vias at no path point)
+3V3: C4.1 C7.1 C8.1 C9.1 C10.1 C11.1 C12.1 C15.1 C17.1 D2.1 D3.5 J2.1 J3.1 R3.1 R4.1 R7.2 U1.2 U1.4 U2.1 U2.9 U2.24 U2.36 U2.48 U3.8 U3.13 | length 208.4
  L1 (Signal) w0.2: 71.7,90.7 U3.8 ; 73.2,87.2 U3.13
  L1 (Signal) w0.25: 79.8,79.7 79.85,79.75 U2.9 ; 79.85,83.75 U2.1 ; 81.2,85.2 81.25,85.15 U2.48 ; U2.24 86.75,76.95 87.05,76.65 87.65,76.65 ; U2.36 88.096,83.75 88.4,84.054
  L1 (Signal) w0.3: C17.1 70.81,91.39 71.025,91.39 71.362,91.052 71.362,91.038 71.7,90.7 ; C15.1 73.2,87.2 ; v1(78.5,77) C9.1 79.5,79.1 79.7,79.3 79.7,79.6 79.8,79.7 ; 79.85,83.75 79.8,83.7 C8.1 78.5,84.7 80.05,86.25 C12.1 81.1,85.3 81.2,85.2 ; 80.3,88.8 80.775,89.275 80.794,89.275 81.269,89.75 R4.1 ; D3.5 v1(81.3,72.2) ; 87.65,76.65 C10.1 87.65,74.55 87.8,74.4 87.8,73.7 ; 88.4,84.054 88.4,84.3 88.6,84.5 C11.1 90.6,84.5 ; 92.7,96.2 94.175,94.725 94.175,94.025 R7.2 94.235,93.965 94.235,89.92 J2.1 ; C4.1 99.457,68.005 D2.1
  L1 (Signal) w0.5: 67.4,89.7 67.4,90.9 68,91.5 C17.1 70.7,92.6 ; 71.7,84 v1(72.4,84) C7.1 78.2,84 C8.1 ; v1(71.7,86) v1@71.727,86 ; C15.1 72.027,86.3 v1@71.727,86 ; 75.5,71.3 76.125,70.675 J3.1 76.1,69.25 76.1,66.5 ; 80.3,88.8 80.3,88.2 77.65,85.55 73.594,85.55 73.144,86 v1@71.727,86 ; 86.2,91.9 86.25,91.85 R3.1 ; 87.1,95.8 87.55,96.25 91.62,96.25 91.67,96.2 92.7,96.2 98.4,96.2 99.1,95.5 99.1,94.3 ; 87.8,73 87.8,73.7 ; 90.6,84.5 90.8,84.7 92,84.7
  L1 (Signal) w0.75: 67.4,88.3 67.4,89.7 ; 68.8,84 71.7,84 ; 70.7,92.6 70.7,94.2 71.5,95 ; 74.7,73.5 75.4,72.8 75.4,71.4 75.5,71.3 ; 76.1,66.5 76.1,65.6 76.2,65.5 ; 85.6,94.4 85.7,94.4 87.1,95.8 ; 86.2,91.9 86.2,93 ; 87.8,72.1 87.8,73 ; 92,84.7 v1(93,84.7) ; v1(95.2,84.7) 97.9,84.7 99.1,85.9 ; 99.1,93.1 99.1,94.3
  L1 (Signal) w1: 67.4,88.3 67.4,87 68.8,85.6 68.8,84 68.8,74.886 69.386,74.3 73.9,74.3 74.7,73.5 ; 71.5,95 85,95 85.6,94.4 86.2,93.8 86.2,93 ; 76.2,65.5 77.7,64 89.6,64 ; 87.8,72.1 87.8,65.8 89.6,64 ; 99.1,85.9 99.1,93.1 ; C4.1 99.4,65.4 98,64 89.6,64
  L4 (Signal) w0.3: v1(72.4,84) 72.4,83.1 v1(78.5,77) 78.5,75 v1(81.3,72.2)
  L4 (Signal) w0.5: v1(71.7,86) 71.7,85.2 72.4,84.5 v1(72.4,84)
  L4 (Signal) w0.75: v1(93,84.7) v1(95.2,84.7)
+5V: C2.1 C3.1 FB1.2 U1.3
GND: C1.2 C2.2 C3.2 C4.2 C5.2 C6.2 C7.2 C8.2 C9.2 C10.2 C11.2 C12.2 C13.2 C14.2 C15.2 C16.2 C17.2 C18.2 D1.2 D3.2 J1.5 J2.5 J3.6 R1.2 R5.2 R6.1 U1.1 U2.8 U2.23 U2.35 U2.47 U2.49 U3.1 U3.9 U3.11 U3.18 U3.25 Y1.2 Y1.4 | length 46.1
  L1 (Signal) w0.2: 71.6,90.2 U3.9 ; 71.8,89.2 U3.11 ; v2(75,89.4) 75,89.35 75.7,88.65 U3.18 ; v2(75,90.5) 75,90.55 75.7,91.25 U3.1
  L1 (Signal) w0.25: 79.6,80.2 79.65,80.25 U2.8 ; U2.47 81.75,85.15 81.8,85.2 ; v2(86.2,83.2) 86.25,83.25 U2.35 88.25,83.25 88.3,83.3 ; U2.23 86.25,76.825 86.275,76.8
  L1 (Signal) w0.3: C16.2 70.81,88.71 71.31,88.71 71.8,89.2 ; C17.2 71.2,90.2 71.6,90.2 ; v1(77.7,72.2) D3.2 ; C9.2 79.21,79.9 79.51,80.2 79.6,80.2 ; U2.47 81.75,83.25 v2(81.8,83.2) ; 81.8,85.2 81.9,85.3 C12.2 ; 86.275,76.8 86.275,76.325 C10.2 ; 88.3,83.3 88.39,83.3 88.79,83.7 C11.2 ; v1(90.2,94) C14.2 ; v1(91.7,90.7) 91.715,90.685 91.715,89.9 J2.5 ; v1@96.59,71.1 v1(96.6,71.1) ; v1(101.6,83.5) J1.5 v1(104.5,83.5) ; R1.2 v1(102.9,71.8)
  L1 (Signal) w0.5: v1(69.5,88.6) C16.2 ; v1(69.5,90.7) C17.2 ; v1(72.3,79.2) cw(c72.35,79.2) 72.35,79.25 C5.2 ; v1(72.737,77.688) 73.925,77.688 Y1.4 ; C15.2 v1(75,86.3) ; v1(74.8,82.5) C7.2 78.1,82.5 C8.2 ; Y1.2 76.463,76.763 ccw(c76.463,76.8) v1(76.5,76.8) ; C6.2 77.35,79.25 ccw(c77.35,79.3) v1(77.4,79.3) 77.746,79.523 ccw(c77.34,80.153) 77.902,79.657 cw(c78.24,79.36) 78.078,79.78 cw(c78.24,79.36) 78.123,79.794 78.49,79.894 C9.2 ; v1(78,87.3) C18.2 ; v1(82.1,88.3) ccw(c82.15,88.3) 82.15,88.25 R6.1 ; v1(82.375,67.8) J3.6 ; v1(83.7,74.1) ccw(c83.7,74.15) 83.75,74.15 C13.2 ; C10.2 86.85,74.25 ccw(c86.9,74.25) v1(86.9,74.2) ; v1(88.7,77) R5.2
  other v1: 98.8,71.6 99.9,71.6 96.7,74.3 96.7,75.3 94.9,76.8 98.9,76.8 100.8,77.4
  other v2: 81.8,78.8 82.9,78.8 84,78.8 85.1,78.8 86.2,78.8 81.8,79.9 82.9,79.9 84,79.9 85.1,79.9 86.2,79.9 81.8,81 82.9,81 84,81 85.1,81 86.2,81 81.8,82.1 82.9,82.1 84,82.1 85.1,82.1 86.2,82.1 82.9,83.2 84,83.2 85.1,83.2 73.9,89.4 73.9,90.5
IMU_CPOUT: C18.1 U3.20 | length 1.6
  L1 (Signal) w0.2: U3.20 77.2,89.2
  L1 (Signal) w0.3: 77.2,89.2 77.9,89.2 C18.1
IMU_INT: U2.45 U3.12 | length 20.7
  L1 (Signal) w0.2: 72,87.7 72.15,87.85 72.15,88.625 72.225,88.7 U3.12
  L1 (Signal) w0.25: 72,87.7 70.4,86.1 70.4,85.046 70.546,84.9 78,84.9 80.5,87.4 82,87.4 82.75,86.65 U2.45
IMU_REGOUT: C16.1 U3.10 | length 1.9
  L1 (Signal) w0.2: 71.7,89.7 U3.10
  L1 (Signal) w0.3: C16.1 71.293,89.4 71.593,89.7 71.7,89.7
IMU_SCL: R3.2 U2.42 U3.23 | length 17.6
  L1 (Signal) w0.2: U3.23 80.1,90.7 v1(80.7,90.1)
  L1 (Signal) w0.25: U2.42 84.25,85.05 85.2,86 85.2,89.7 R3.2 85.25,91.75 85.1,91.9 v1(84.3,91.9)
  L4 (Signal) w0.2: v1(80.7,90.1) 81.6,90.1 83.4,91.9 v1(84.3,91.9)
IMU_SDA: R4.2 U2.43 U3.24 | length 14.6
  L1 (Signal) w0.2: U3.24 77.3,91.2
  L1 (Signal) w0.25: 77.3,91.2 83.8,91.2 84.25,90.75 R4.2 84.25,86.35 83.75,85.85 U2.43
LED_PWR_C: D2.2 R1.1 | length 1
  L1 (Signal) w0.3: D2.2 R1.1
MCU_BOOT0: R6.2 U2.44 | length 3
  L1 (Signal) w0.25: R6.2 83.25,87.3 U2.44
MCU_LED_A: D4.1 U2.26 | length 2.1
  L1 (Signal) w0.25: U2.26 D4.1
MCU_LED_C: D4.2 R5.1 | length 1.8
  L1 (Signal) w0.25: R5.1 90.404,77.834 90.495,77.926 D4.2
MCU_NRST: C14.1 J2.3 R7.1 U2.7 | length 36.7
  L1 (Signal) w0.2: v1(77.34,80.153) 77.747,80.413 ccw(c77.532,80.75) 77.814,80.467 78.098,80.75 U2.7 ; v1(90.9,95.5) 91.7,95.5 91.9,95.3 C14.1 R7.1 93.3,92.9 93.1,92.7 93.1,89.985 J2.3
  L4 (Signal) w0.2: v1(77.34,80.153) 77.874,80.576 ccw(c77.75,80.733) 77.892,80.592 79.6,82.3 79.6,85 79.9,85.3 85,85.3 87.2,87.5 87.2,93.9 88.8,95.5 v1(90.9,95.5)
MCU_OSC_IN: C5.1 U2.5 Y1.1 | length 15.7
  L1 (Signal) w0.2: Y1.1 73.775,77.05 71.261,77.05 71.144,77.167 71.144,77.333 72.408,78.597 73.892,78.597 74.24,78.946 74.24,79.09 C5.1 74.4,81 74.9,81.5 77.3,81.5 77.55,81.75 U2.5
MCU_OSC_OUT: R2.1 U2.6 | length 4.4
  L1 (Signal) w0.2: R2.1 77.268,80.75 ccw(c77.268,80.95) 77.286,80.751 cw(c77.34,80.153) 77.394,80.751 ccw(c77.411,80.95) 77.411,80.75 77.532,80.75 78.032,81.25 U2.6
MCU_PA4: D3.1 J3.2 U2.14 | length 11.1
  L1 (Signal) w0.25: J3.2 77.375,71.641 77.075,71.941 77.075,72.459 77.466,72.85 D3.1 78.55,74.123 81.302,76.875 81.436,76.875 81.7,77.139 81.7,77.275 81.75,77.325 U2.14
MCU_PA5: D3.3 J3.3 U2.15 | length 10.2
  L1 (Signal) w0.25: J3.3 78.588,69.313 78.588,71.512 D3.3 78.635,71.635 78.955,71.635 79.375,72.055 79.375,74.311 81.489,76.425 81.623,76.425 82.15,76.952 82.15,77.086 82.25,77.186 U2.15
MCU_PA6: D3.4 J3.4 U2.16 | length 10.4
  L1 (Signal) w0.25: J3.4 79.9,69.3 79.9,71.09 80.36,71.55 D3.4 80.365,71.635 80.045,71.635 79.825,71.855 79.825,73.225 81.1,74.5 81.1,75.4 81.675,75.975 81.809,75.975 82.6,76.766 82.6,76.9 82.75,77.05 U2.16
MCU_PA7: D3.6 J3.5 U2.17 | length 11.9
  L1 (Signal) w0.25: J3.5 81.125,70.829 81.925,71.629 81.925,72.459 81.559,72.825 80.475,72.825 D3.6 80.855,72.85 81.041,72.85 81.559,72.85 81.95,72.85 82.5,73.4 82.5,76.029 83.05,76.579 83.05,76.714 83.25,76.914 U2.17
MCU_SWCLK: J2.4 U2.37 | length 9.6
  L1 (Signal) w0.25: U2.37 86.75,85.15 87.1,85.5 91.9,85.5 93,86.6 J2.4
MCU_SWDIO: J2.2 U2.34 | length 11.4
  L1 (Signal) w0.2: 91.3,82.9 92.425,84.025 93.28,84.025 94.27,85.015 J2.2
  L1 (Signal) w0.25: U2.34 91.15,82.75 91.3,82.9
MCU_SWO: J2.6 U2.39 | length 8.9
  L1 (Signal) w0.25: U2.39 85.75,85.05 87.3,86.6 91.054,86.6 91.73,87.276 J2.6
MCU_VCAP1: C13.1 U2.22 | length 2.1
  L1 (Signal) w0.25: 85.7,76.8 85.75,76.85 U2.22
  L1 (Signal) w0.3: C13.1 85.5,76 85.5,76.6 85.7,76.8
USB_D_N: J1.2 U2.32 | length 16
  L1 (Signal) w0.26: U2.32 87.665,81.75 87.683,81.768 95.043,81.768 95.168,81.643 103.197,81.643 J1.2
USB_D_P: J1.3 U2.33 | length 16
  L1 (Signal) w0.26: U2.33 87.665,82.25 87.683,82.232 95.235,82.232 95.36,82.107 103.197,82.107 J1.3
VBUS: C1.1 D1.1 FB1.1 J1.1
XTAL_IN: C6.1 R2.2 Y1.3 | length 3.1
  L1 (Signal) w0.2: Y1.3 75.6,77.95 C6.1 75.575,79.275 75.575,80.725 R2.2
pads on no net: J1.4 J1.6 J1.7 J1.8 J1.9 J1.10 J1.11 J2. J3.MP1 J3.MP2 U2.2 U2.3 U2.4 U2.10 U2.11 U2.12 U2.13 U2.18 U2.19 U2.20 U2.21 U2.25 U2.27 U2.28 U2.29 U2.30 U2.31 U2.38 U2.40 U2.41 U2.46 U3.2 U3.3 U3.4 U3.5 U3.6 U3.7 U3.14 U3.15 U3.16 U3.17 U3.19 U3.21 U3.22

## Polygon pours and split planes (outlines as drawn)
GND on L1 (Signal) "VCC_L01_P-001" (solid, remove dead copper, pour order 10): 98.5,69 100.9,69 101,69.1 101,71.9 99.8,73.1 97.2,73.1 97.2,76.2 97.4,76.4 100.6,76.4 101.6,77.4 101.6,78.625 101.5,78.725 100.425,78.725 100.075,78.375 98.025,78.375 97.825,78.175 97.675,78.325 94.35,78.325 94.35,76.475 94.5,76.325 94.15,75.975 94.15,73.325 95,73.325 95.8,72.525 95.8,70.875 96.875,69.8 97.775,69.8 97.775,69.725
+3V3 on L1 (Signal) "VCC_L01_P-001" (solid, remove dead copper, pour order 7): 92.5,64.8 96.1,64.8 96.3,65 96.3,66.5 97.5,66.5 98.1,67.1 100.8,67.1 100.8,68.6 100.6,68.8 95.1,68.8 95.1,72.7 94.7,73.1 93.5,73.1 93.5,67.5 92.4,66.4 92.4,64.9 92.4,66.4 92.4,64.9
+5V on L1 (Signal) "VCC_L01_P-001" (solid, remove dead copper, pour order 5): 93.9,79.3 92.4,77.8 92.4,76.3 92.3,76.3 91.2,75.2 91.2,71.4 92.8,71.4 92.9,71.5 92.9,73.2 93.1,73.2 93.8,73.9 93.8,77.2 93.5,77.5 93.5,78.5 93.8,78.5 93.9,78.6 96.8,78.6 96.8,80.2 93.9,80.2
VBUS on L1 (Signal) "VCC_L01_P-001" (solid, remove dead copper, pour order 1): 104,81.2 97.9,81.2 97,80.2 97,78.4 97.7,78.4 98.1,78.8 100.2,78.8 100.3,78.9 101.6,78.9 101.6,80.2 102,80.6 104,80.6
GND on L2 (GND) "VCC_L01_P-001" (solid, remove dead copper, pour order 8): 66.3,95.1 cw(c67.9,95.1) 67.9,96.7 106.3,96.7 cw(c106.3,95.2) 107.8,95.2 107.8,64.4 cw(c106.6,64.4) 106.6,63.2 67.5,63.2 cw(c67.5,64.4) 66.3,64.4
GND on L3 (PWR) "VCC_L01_P-001" (solid, remove dead copper, pour order 9): 66.3,95.1 cw(c67.9,95.1) 67.9,96.7 106.3,96.7 cw(c106.3,95.2) 107.8,95.2 107.8,64.4 cw(c106.6,64.4) 106.6,63.2 67.5,63.2 cw(c67.5,64.4) 66.3,64.4

## Silkscreen, mask and mechanical layers (free items; w line width, h text height)
Mechanical 1:
  lines w0.2: 66,64.27 ccw(c67.27,64.27) 67.27,63 106.73,63 ccw(c106.73,64.27) 108,64.27 108,72.135 108,87.865 108,95.73 ccw(c106.73,95.73) 106.73,97 67.27,97 ccw(c67.27,95.73) 66,95.73 66,64.27